# Altium PCB 2018_ACU_LVPWR_rev1.PcbDoc
Units mil, origin at the board's own origin, x right, y up, seen from the top; angles counter-clockwise.
Board outline 7030 x 2760 mil, 2 copper layers (Top Layer, Bottom Layer); 87 components, 72 nets, 303 pads, 163 vias.
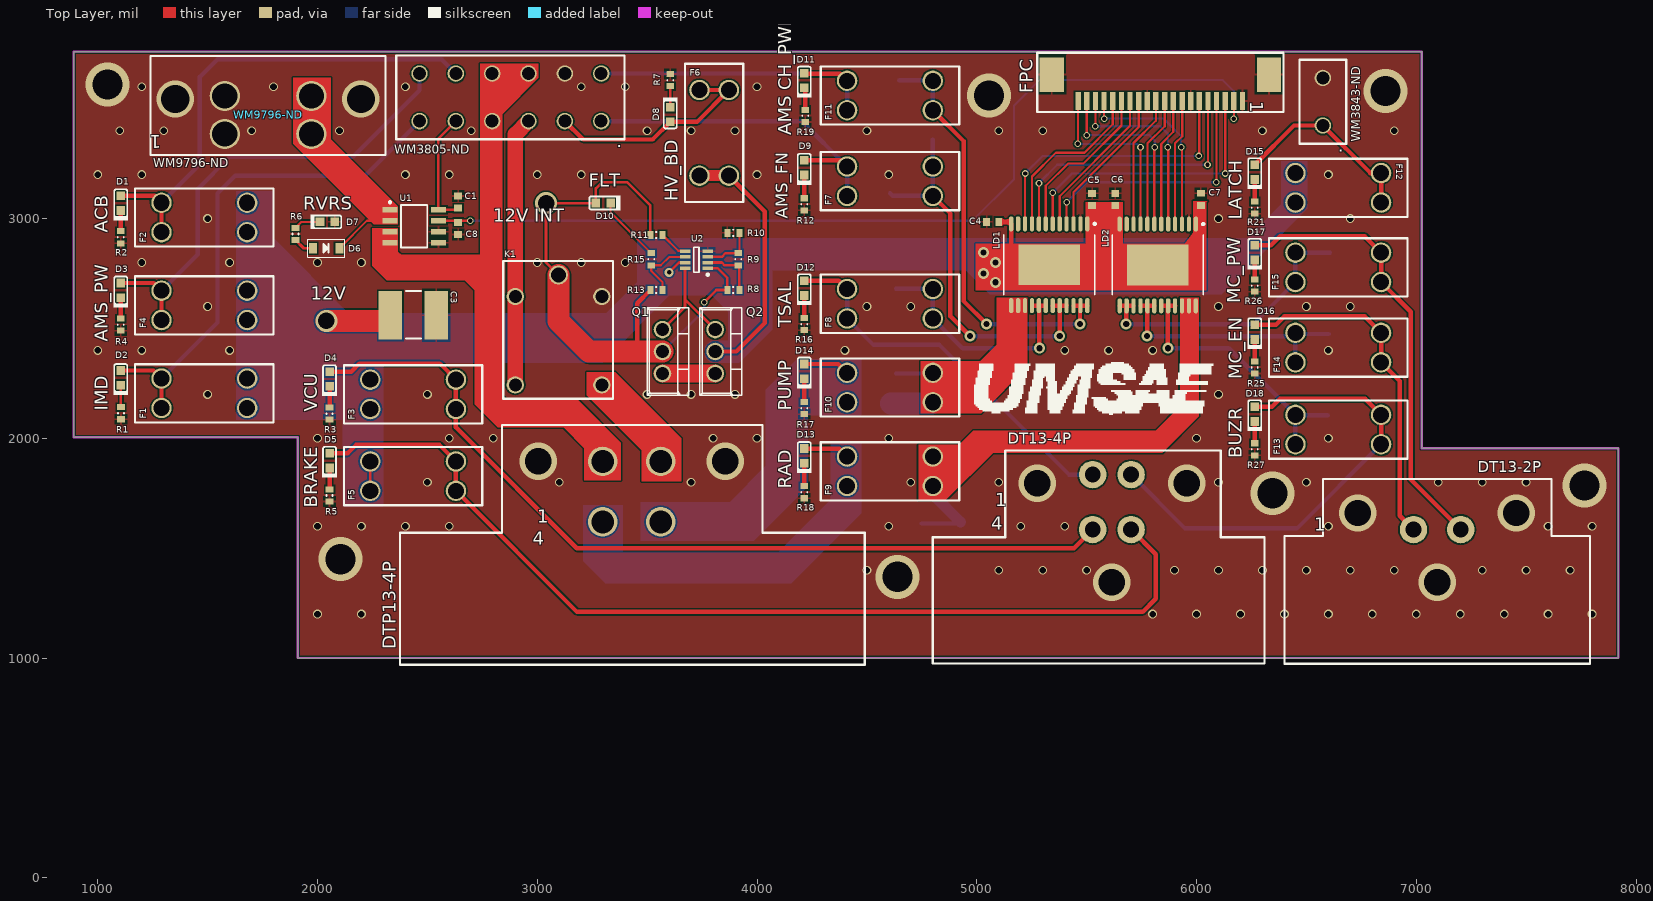
[diagram p0: Top Layer view]
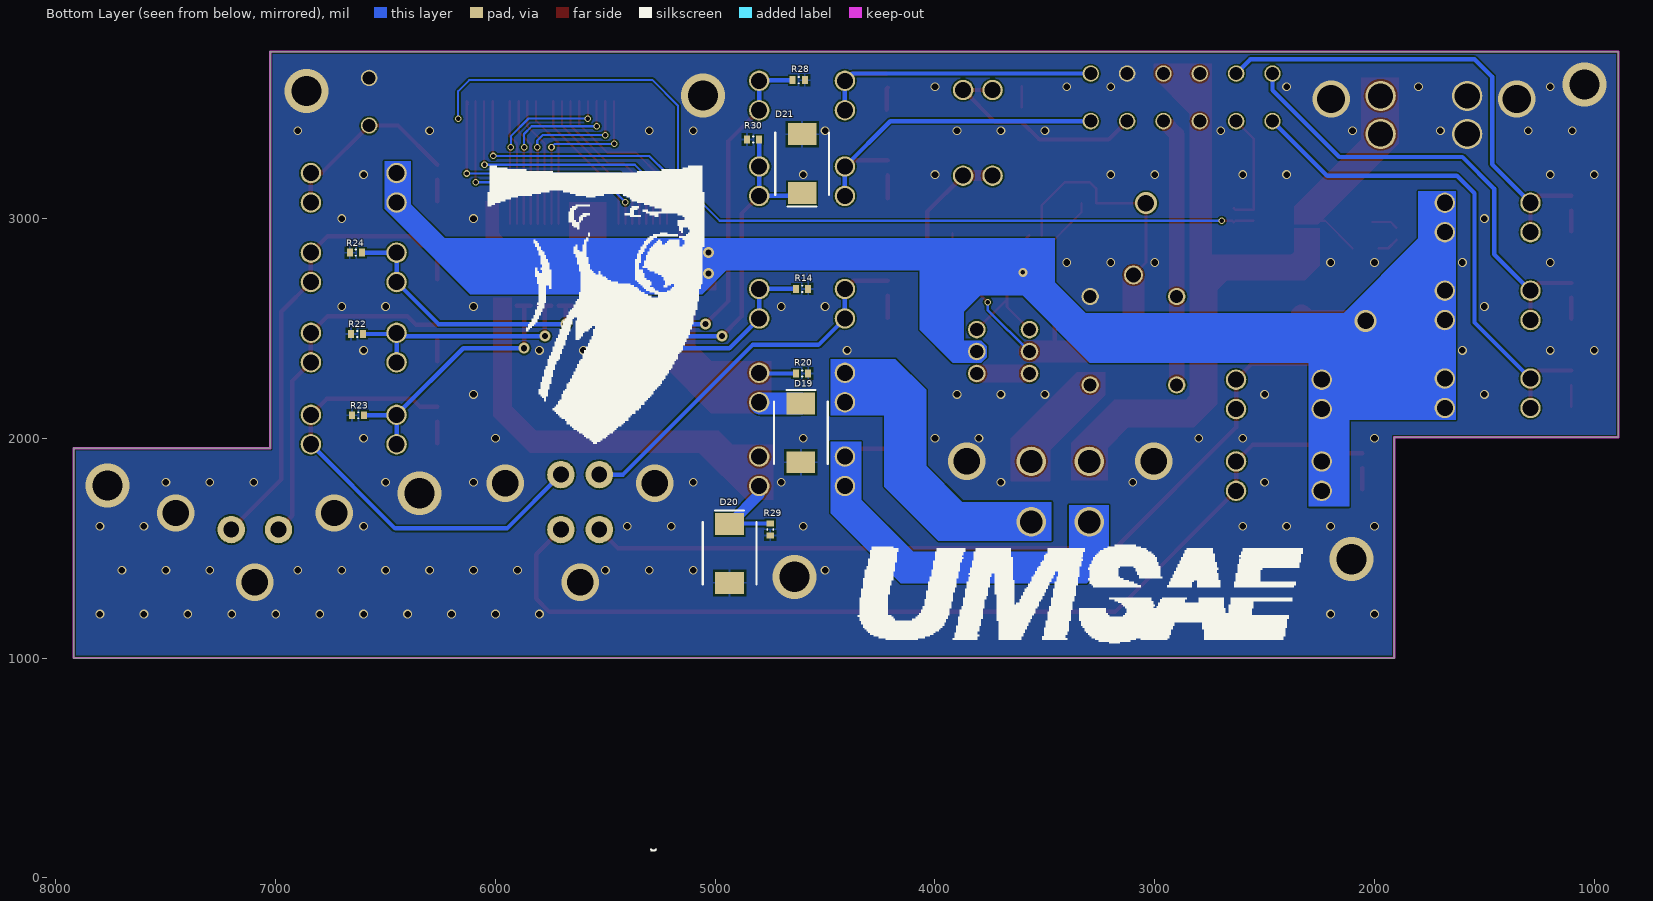
[diagram p1: Bottom Layer view, seen from below]

## Layer stack, top to bottom
Top Solder: solder mask 0.4, Solder Resist, Dk 3.5
Top Layer: signal copper 1.4
Dielectric 1: dielectric 12.6, FR-4, Dk 4.8
Bottom Layer: signal copper 1.4
Bottom Solder: solder mask 0.4, Solder Resist, Dk 3.5

## Board outline
890,3760 7025,3760 7025,1955 7920,1955 7920,1000 1910,1000 1910,2005 890,2005

## Design rules (kind name [scope] priority, off if disabled: settings)
Clearance [All] p1: gap=7 ignorepadtopadclearanceinfootprint=FALSE except(0: Arc-Hole Track-Hole SMDPad-Hole THPad-Hole Via-Hole Fill-Hole Poly-Hole Region-Hole Text-Hole)
Height [All] p1: minheight=0 maxheight=99999 prefheight=500
HoleSize [All] p1: absolutevalues=TRUE maxlimit=200 minlimit=15 maxpercent=80.000 minpercent=20.000
HoleToHoleClearance [All] p1: gap=8 allowstackedmicrovias=TRUE
MinimumAnnularRing MinimumAnnularRing_Pad [IsPad] p1: minimumring=7
MinimumAnnularRing MinimumAnnularRing_Via [IsVia] p2: minimumring=5
MinimumSolderMaskSliver [All] p1: minsoldermaskwidth=4
PlaneClearance [All] p1: clearance=15
PlaneConnect PlaneConnect_12V [InNet('12V')] p1: planeconnectstyle=Direct reliefexpansion=20 reliefentries=4 reliefconductorwidth=20 reliefairgap=10
PlaneConnect PlaneConnect_1 [All] p2: planeconnectstyle=Relief reliefexpansion=15 reliefentries=4 reliefconductorwidth=15 reliefairgap=10
PolygonConnect PolygonConnect_2 [All vs IsPadHoleValid] p1: connectstyle=Direct reliefconductorwidth=10 reliefentries=4 polygonreliefangle="90 Angle" airgapwidth=10
PolygonConnect PolygonConnect_1 [InNet('GND') vs IsPad] p2: connectstyle=Relief reliefconductorwidth=10 reliefentries=4 polygonreliefangle="90 Angle" airgapwidth=10
PolygonConnect [All] p3: connectstyle=Direct reliefconductorwidth=15 reliefentries=4 polygonreliefangle="90 Angle" airgapwidth=10
RoutingVias [All] p1: holewidth=17 width=31 viastyle="Through Hole" minholewidth=15 minwidth=29 maxholewidth=50 maxwidth=100
SilkToSilkClearance [All] p1: silktosilkclearance=7
SilkToSolderMaskClearance [IsPad] p1: minsilkscreentomaskgap=2 clearancetoexposedcopper=TRUE
SolderMaskExpansion [All] p1: expansion=3
Width [All] p1: maxlimit=200 minlimit=7 preferedwidth=15
22 further rules are at their usual default settings.

## Classes and differential pairs
component class Sheet1: DT1 DT2 DT13-2P DT13-4P DTP1 DTP13-4P FPC WM1 WM3805-ND WM3843-ND WM9796-ND
component class Sheet2: C1 C3 C8 D6 D7 D10 K1 Q1 Q2 R6 R8 R9 R10 R11 R13 R15 U1 U2
component class Sheet4: C4 C5 C6 C7 D19 D20 D21 LD1 LD2 R14 R20 R22 R23 R24 R28 R29 R30
component class Sheet5: D1 D2 D3 D4 D5 D8 D9 D11 D12 D13 D14 D15 D16 D17 D18 F1 F2 F3 F4 F5 F6 F7 F8 F9 F10 F11 F12 F13 F14 F15 R1 R2 R3 R4 R5 R7 R12 R16 R17 R18 R19 R21 R25 R26 R27

## Components (designator, comment, footprint, x,y, rotation, side; value= is the part's Value field where it differs from the comment)
C1 "Cap Semi" 1608[0603] 2640,3075 r270 top
C3 "Cap Semi" "2J-LEAD 6.1 X 5.3" 2438.03,2560 r0 top
C4 "Cap Semi" 1608[0603] 5072.44,2985 r0 top
C5 "Cap Semi" 1608[0603] 5525,3087.44 r270 top
C6 "Cap Semi" 1608[0603] 5630,3087.44 r270 top
C7 "Cap Semi" 1608[0603] 6020,3087.56 r270 top
C8 "Cap Semi" 1608[0603] 2640,2955 r90 top
D1 "KP-1608MGC" KING-0603LED_GREEN_V 1105,3070 r90 top
D2 "KP-1608MGC" KING-0603LED_GREEN_V 1105,2275 r90 top
D3 "KP-1608MGC" KING-0603LED_GREEN_V 1105,2673.47 r90 top
D4 "KP-1608MGC" KING-0603LED_GREEN_V 2055,2270 r90 top
D5 "KP-1608MGC" KING-0603LED_GREEN_V 2055,1898.47 r90 top
D6 "" SOD-123 2099.7,2865 r180 top
D7 "RVS PLTY" TOSH-0603LED_RED_V 2045,2985 r0 top
D8 "KP-1608MGC" KING-0603LED_GREEN_V 3605,3473.46 r270 top
D9 "KP-1608MGC" KING-0603LED_GREEN_V 4215,3231.54 r90 top
D10 "RVS PLTY" TOSH-0603LED_RED_V 3300.44,3071.2 r180 top
D11 "KP-1608MGC" KING-0603LED_GREEN_V 4215,3628.47 r90 top
D12 "KP-1608MGC" KING-0603LED_GREEN_V 4215,2683.47 r90 top
D13 "KP-1608MGC" KING-0603LED_GREEN_V 4215,1920 r90 top
D14 "KP-1608MGC" KING-0603LED_GREEN_V 4215,2305 r90 top
D15 "KP-1608MGC" KING-0603LED_GREEN_V 6265,3211.54 r90 top
D16 "KP-1608MGC" KING-0603LED_GREEN_V 6265,2483.47 r90 top
D17 "KP-1608MGC" KING-0603LED_GREEN_V 6265,2845 r90 top
D18 "KP-1608MGC" KING-0603LED_GREEN_V 6265,2110 r90 top
D19 "S8MC-13" S8MC-13 4610,2025 r90 bottom
D20 "S8MC-13" S8MC-13 4935,1476.14 r90 bottom
D21 "S8MC-13" S8MC-13 4605,3250 r270 bottom
DT13-2P "DT13-2P" DT13-2P 7095,1345 r180 top
DT13-4P "DT13-4P" DT13-4P 5615,1345 r180 top
DTP13-4P "DTP13-4P" DTP13-4P 3430,1620 r180 top
F1 "2A Fuse" "FUSE HOLDER - 3568" 1485,2205 r180 top
F2 "1A Fuse" "FUSE HOLDER - 3568" 1485,3005 r180 top
F3 "1A Fuse" "FUSE HOLDER - 3568" 2435,2200 r0 top
F4 "1A Fuse" "FUSE HOLDER - 3568" 1485,2605 r180 top
F5 "2A Fuse" "FUSE HOLDER - 3568" 2435,1828 r0 top
F6 "1A Fuse" "FUSE HOLDER - 3568" 3805,3390 r90 top
F7 "2A Fuse" "FUSE HOLDER - 3568" 4605,3170 r180 top
F8 "2A Fuse" "FUSE HOLDER - 3568" 4605,2612.5 r180 top
F9 "10A Fuse" "FUSE HOLDER - 3568" 4605,1850 r180 top
F10 "15A Fuse" "FUSE HOLDER - 3568" 4605,2231.25 r180 top
F11 "1A Fuse" "FUSE HOLDER - 3568" 4605,3560 r180 top
F12 "1A Fuse" "FUSE HOLDER - 3568" 6645,3140 r0 top
F13 "2A Fuse" "FUSE HOLDER - 3568" 6645,2040 r0 top
F14 "1A Fuse" "FUSE HOLDER - 3568" 6645,2413 r0 top
F15 "3A Fuse" "FUSE HOLDER - 3568" 6645,2778 r0 top
FPC "Header 20" A100319CT-ND 5835.4,3535 r180 top
K1 "Relay" "RELAY -   Z2696-ND" 2900,2444.21 r90 top
LD1 "LD - VNQ5050AKTR-E" "24-SOP (0.295\", 7.50MM WIDTH) EXPOSED PAD" 5330,2790 r270 top
LD2 "LD - VNQ5050AKTR-E" "24-SOP (0.295\", 7.50MM WIDTH) EXPOSED PAD" 5823.74,2788.98 r270 top
Q1 "" TO220V-GDS 3570,2495 r270 top
Q2 "" TO220V-GDS 3810,2495 r270 top
R1 "560" RESC0603(1608)_L 1106,2114.5 r270 top
R2 "560" RESC0603(1608)_L 1105,2915 r270 top
R3 "560" RESC0603(1608)_L 2055,2112.44 r270 top
R4 "560" RESC0603(1608)_L 1105,2517.44 r270 top
R5 "560" RESC0603(1608)_L 2055,1740 r270 top
R6 "430" RESC0603(1608)_L 1900,2930 r270 top
R7 "560" RESC0603(1608)_L 3605,3630 r90 top
R8 "1M" RESC0603(1608)_L 3892.44,2675 r180 top
R9 "12.4K" RESC0603(1608)_L 3915,2815 r270 top
R10 "30.9K" RESC0603(1608)_L 3892.56,2935 r0 top
R11 "10K" RESC0603(1608)_L 3542.44,2925 r0 top
R12 "560" RESC0603(1608)_L 4215,3065 r270 top
R13 "10K" RESC0603(1608)_L 3542.44,2675 r0 top
R14 "10K" RESC0603(1608)_L 4605,2680 r0 bottom
R15 "430" RESC0603(1608)_L 3518.82,2815 r90 top
R16 "560" RESC0603(1608)_L 4215,2520 r270 top
R17 "560" RESC0603(1608)_L 4215,2137.44 r270 top
R18 "560" RESC0603(1608)_L 4215,1755 r270 top
R19 "560" RESC0603(1608)_L 4220,3467.44 r270 top
R20 "10K" RESC0603(1608)_L 4605,2295 r0 bottom
R21 "560" RESC0603(1608)_L 6265,3050 r270 top
R22 "10K" RESC0603(1608)_L 6630,2475 r0 bottom
R23 "10K" RESC0603(1608)_L 6625,2105 r0 bottom
R24 "10K" RESC0603(1608)_L 6635,2845 r180 bottom
R25 "560" RESC0603(1608)_L 6265,2322.44 r270 top
R26 "560" RESC0603(1608)_L 6265,2695 r270 top
R27 "560" RESC0603(1608)_L 6265,1950 r270 top
R28 "10K" RESC0603(1608)_L 4620,3630 r180 bottom
R29 "10K" RESC0603(1608)_L 4750,1585 r270 bottom
R30 "10K" RESC0603(1608)_L 4827.56,3360 r180 bottom
U1 "ACS712ELCTR-20A-T" ALEG-LC-8_V 2440,2965 r270 top
U2 "LTC4365ITS8#TRMPBF" LT-TS8-8-TSOT-23_V 3724.13,2812.8 r180 top
WM3805-ND "Header 12" WM3805-ND 3291.06,3443.46 r180 top
WM3843-ND "Header 2" WM3843-ND 6575,3423.46 r180 top
WM9796-ND "WM9796-ND" WM9796-ND 1775,3385 r180 top

## Footprints (in the part's own frame and the unit in brackets; to place one, negate y for a bottom-side part, rotate by r counter-clockwise, add the part's x,y. Pads: shape width x height; smd on the part's side, far side on the other; paste and mask are expansions set on the pad)
"2J-LEAD 6.1 X 5.3" [mm]
  rect 2.7x5.6 smd: 1(-2.7,0) 2(2.6,0)
  silkscreen extent -0.9,-2.7 0.8,2.8, body extent -3.4,-2.8 3.3,2.8, height 5
"24-SOP (0.295\", 7.50MM WIDTH) EXPOSED PAD" [mm] "VNQ5050KTR-E"
  oval 1.75x0.5 smd: 1(-4.725,4.4) 2(-4.725,3.6) 3(-4.725,2.8) 4(-4.725,2) 5(-4.725,1.2) 6(-4.725,0.4) 7(-4.725,-0.4) 8(-4.725,-1.2) 9(-4.725,-2) 10(-4.725,-2.8) 11(-4.725,-3.6) 12(-4.725,-4.4) 13(4.725,-4.4) 14(4.725,-3.6) 15(4.725,-2.8) 16(4.725,-2) 17(4.725,-1.2) 18(4.725,-0.4) 19(4.725,0.4) 20(4.725,1.2) 21(4.725,2) 22(4.725,2.8) 23(4.725,3.6) 24(4.725,4.4)
  rect 4.7x7.1 smd: 25(0,0)
  silkscreen extent -4.85,-5.25 3.45,5.38, body extent -3.8,-5.25 3.8,5.25, height 2.45
1608[0603] [mm] "Chip Capacitor, Body 1.6x0.8mm, IPC High Density"
  rect 0.8x0.9 smd: 1(-0.7,0) 2(0.7,0)
  body extent -0.87,-0.48 0.87,0.48, height 1.3
A100319CT-ND [mil]
  rect 24x82.68 smd: 1(-374.02,0)
  rect 24x80 smd: 2(-334.65,0) 3(-295.28,0) 4(-255.91,0) 5(-216.54,0) 6(-177.17,0) 7(-137.8,0) 8(-99.6,0) 9(-59.06,0) 10(-19.69,0) 11(20.4,0) 12(59.06,0) 13(98.43,0) 14(137.8,0) 15(177.17,0) 16(216.54,0) 17(255.91,0) 18(295.28,0) 19(334.65,0) 20(374.02,0)
  rect 110.24x157.48 smd: 21(-494.09,-120.08) 21(494.09,-120.08)
  silkscreen extent -560,-220 560,50, body extent -550,-226 550,32, height 100
ALEG-LC-8_V [mm] "SOIC, 8-Leads, Body 4.9x3.9mm, Pitch 1.27mm"
  rect 0.65x1.75 smd: 1(-1.905,-2.8) 2(-0.635,-2.8) 3(0.635,-2.8) 4(1.905,-2.8) 5(1.905,2.8) 6(0.635,2.8) 7(-0.635,2.8) 8(-1.905,2.8)
  silkscreen extent -2.9,-2.92 2.45,1.53, body extent -2.45,-1.95 2.45,1.95, height 1.75
DT13-2P [mil]
  round 125 hole 72: 1(107.5,-240) 2(-107.5,-240)
  silkscreen extent -695,-470 695,371, body extent -695,-475 695,945, height 1090
DT13-4P [mil]
  round 125 hole 72: 1(87.5,-490) 2(-87.5,-490) 3(-87.5,-240) 4(87.5,-240)
  silkscreen extent -695,-600 815,370, body extent -700,-607 810,947, height 1394
DTP13-4P [mil]
  round 134 hole 104: 1(132,-275) 2(-132,-275) 3(-132,0) 4(132,0)
  silkscreen extent -1060,-440 1055,650, body extent -1070,-440 1060,1397, height 1419
"FUSE HOLDER - 3568" [mil]
  round 93 hole 73: 1(-195,-67) 1(-195,67) 2(195,-67) 2(195,67)
  silkscreen extent -315,-133 315,133, body extent -317,-130 313,135, height 290
KING-0603LED_GREEN_V [mm] "SMT LED, 2-Leads, Body 1.6x0.8mm (0603-Size)"
  rect 1x1 smd paste+0 mask+0: 1(0.85,0) 2(-0.85,0)
  silkscreen extent -1.97,-0.85 1.6,0.85, body extent -0.92,-0.53 1.09,0.53, height 1.1
LT-TS8-8-TSOT-23_V [mm] "SOT23, 8-Leads, Body 2.9x1.75mm, Pitch 0.65mm"
  rect 1.22x0.4 smd mask+0: 1(-1.31,0.975) 2(-1.31,0.325) 3(-1.31,-0.325) 4(-1.31,-0.975) 5(1.31,-0.975) 6(1.31,-0.325) 7(1.31,0.325) 8(1.31,0.975)
  silkscreen extent -1.43,-1.45 0.3,1.85, body extent -0.87,-1.45 0.88,1.45, height 1
"RELAY -   Z2696-ND" [mm]
  round 2.2 hole 1.7: 1(7.6,-5)
  round 2 hole 1.5: 2(5.1,0) 3(-5.1,0) 4(-5.1,-10) 5(5.1,-10)
  silkscreen extent -6.7,-11.3 9.2,1.4
RESC0603(1608)_L [mm]
  rect 0.7x0.9 smd: 1(-0.7,0) 2(0.7,0)
  silkscreen extent -0.05,-0.35 0.05,0.35, body extent -0.85,-0.47 0.85,0.47, height 0.6
S8MC-13 [mil]
  rect 100x130 smd: 1(-133.86,0) 2(133.86,0)
  silkscreen extent -142,-122 195,122
SOD-123 [mm]
  rect 0.9x1.2 smd: A(3.048,0) K(0,0)
  silkscreen extent -0.64,-1.02 3.68,1.02, body extent -0.18,-0.87 3.3,0.87, height 0.79
TO220V-GDS [mil]
  round 80 hole 60: D(100,0) G(0,0) S(200,0)
  silkscreen extent -100,-70 300,120, body extent -100,-70 300,120, height 920
TOSH-0603LED_RED_V [mm] "SMT LED, 2-Leads, Body 1.6x0.8mm (0603-Size)"
  rect 1x1 smd paste+0 mask+0: 1(0.85,0) 2(-0.85,0)
  silkscreen extent -1.97,-0.85 1.6,0.85, body extent -0.92,-0.53 1.09,0.53, height 0.6
WM3805-ND [mm]
  round 1.9 hole 1.5: 1(0,0) 2(4.2,0) 3(8.4,0) 4(12.6,0) 5(16.8,0) 6(21,0) 7(0,-5.5) 8(4.2,-5.5) 9(8.4,-5.5) 10(12.6,-5.5) 11(16.8,-5.5) 12(21,-5.5)
  silkscreen extent -2.7,-7.6 23.7,2.1, body extent -3.06,-8.74 24.14,2.26, height 12.8
WM3843-ND [mm]
  round 1.9 hole 1.5: 1(0,0) 2(0,-5.5)
  silkscreen extent -2.7,-7.6 2.7,2.1, body extent -3.1,-8.74 3.1,2.26, height 12.8
WM9796-ND [mm]
  round 3.5 hole 2.9: 1(5,0) 1(5,-4.4) 2(-5,0) 2(-5,-4.4)
  silkscreen extent -13.59,-9.02 13.59,2.41, body extent -11.78,-9.51 12.04,4.59, height 21.3

## Part data
C1 C3 C4 C5 C6 C7 C8: "Capacitor (Semiconductor SIM Model)"
D1 D2 D3 D4 D5 D8 D9 D11 D12 D13 D14 D15 D16 D17 D18: library part CMP-0404-00001-1, "LED, SMT, 0603(1608), 1.1mm thickness, Green"
D6: library part "Diode 1N4003", "1 Amp General Purpose Rectifier"
D7 D10: library part CMP-0444-00001-1, "LED, Red 0603 (1608) 63mCd"
D19 D20 D21: library part Diode, "Default Diode"
DT13-2P WM9796-ND: library part "Header 2", "Header, 2-Pin"
DT13-4P DTP13-4P: library part "Header 4", "Header, 4-Pin"
F1 F2 F3 F4 F5 F6 F7 F8 F9 F10 F11 F12 F13 F14 F15: library part "Fuse 1", "Fuse"
FPC: "Header, 20-Pin"
K1: "SPDT Relay"
LD1 LD2: library part "LOAD DRIVER - VNQ5050"
Q1 Q2: library part CMP-1058-00860-1, "Power MOSFET, 40 V, 167 A, Single N-Channel, 3-Pin TO-220, Pb-Free, Tube"
R1 R2 R3 R4 R5 R6 R7 R8 R9 R10 R11 R12 R13 R14 R15 R16 R17 R18 R19 R20 R21 R22 R23 R24 R25 R26 R27 R28 R29 R30: library part CMP-1591-00001-1, "0603 (1608 Metric) Chip Resistor"
U1: library part CMP-0826-00001-1, "Linear Current Sensor IC, 4.5 to 5.5 V Supply Voltage, 10 mA Supply Current, -40 to 85 degC, 8-Pin SOIC (LC), RoHS, Tape and Reel"
U2: library part CMP-0474-00861-1, "UV, OV and Reverse Supply Protection Controller, 2.5 to 34 V Vin, 8-pin SOT23 (TS8-8), -40 to 85 degC, Pb-Free, Mini Tape and Reel"
WM3805-ND: "Header, 12-Pin"
WM3843-ND: "Header, 2-Pin"

## Via types
v1: diameter 40, hole 30, Top Layer to Bottom Layer, 112 vias
v2: diameter 30, hole 20, Top Layer to Bottom Layer, 19 vias
v3: diameter 50, hole 28, Top Layer to Bottom Layer, 12 vias
v4: diameter 170, hole 120, Top Layer to Bottom Layer, 8 vias
v5: diameter 200, hole 137, Top Layer to Bottom Layer, 7 vias
v6: diameter 100, hole 75, Top Layer to Bottom Layer, 2 vias
v7: diameter 170, hole 128, Top Layer to Bottom Layer, 2 vias
v8: diameter 40, hole 20, Top Layer to Bottom Layer, 1 vias

## Nets (pads, with @x,y where several pads share a name; then routed paths per layer and width w, separated by ;. In a path a pad name is that pad's centre, name@x,y a point inside that pad or via, vN(x,y) a via of type N, cw(c..) or ccw(c..) an arc to the next point about the centre after c; other vN are vias at no path point)
5V: C1.2 U1.8 WM3805-ND.5 | length 529.7
  Top Layer w12: WM3805-ND.5 2550.24,3364.06 U1.8 2632.56,3040 C1.2
  Bottom Layer w20: WM3805-ND.5 WM3805-ND.5@2630,3443.11
12V: C3.1 C4.2 C5.2 C6.2 C7.2 F1.1 F2.1 F3.1 F4.1 F5.1 F6.1 F12.1 LD1.1 LD1.12 LD1.25 LD2.1 LD2.12 LD2.25 Q2.D U2.7 | length 1842.4
  Top Layer w12: F5.1@2240,1761 F5.1@2240,1895 ; v8(3600,2755) 3645,2800 U2.7
  Top Layer w20: Q2.D 3905,2395 4035,2525 4035,3032 F6.1@3872,3195 ; C4.2 5147.8,2985 LD1.12 5156.77,2871.77
  Top Layer w50: F6.1@3738,3195 F6.1@3872,3195
  Top Layer w100: v6(2040,2535) 2306.73,2535 C3.1
  other v3: 5085,2710 5030,2750 5085,2800 5030,2845
12V_FROM_MS: DTP13-4P.2 K1.4
12V_IN: D6.K U1.1 U1.2 WM9796-ND.2 | length 281.8
  Top Layer w10: D6.K 2224.7,2990 U1.2
12V_INTERMEDIATE: D10.1 K1.1 Q1.D R8.2 R11.1 R13.1 U2.1 | length 2720.9
  Top Layer w12: K1.1@3080,2760.28 3040,2800.28 v6(3040,3070) 3265.78,3070 D10.1 3266.97,3136.97 3295,3165 3410,3165 3514.88,3060.12 R11.1 ; v2(3760,2620) 3815,2675 R8.2 3864.88,2730.12 3820.59,2774.41 U2.1
  Top Layer w20: 3455,2395 3455,2615.12 R13.1
  Top Layer w50: K1.1@3080,2760.28 K1.1
  Top Layer w100: K1.1 3096.85,2533.15 3235,2395 3455,2395 Q1.D
  Bottom Layer w12: Q1.D 3760,2585 v2(3760,2620)
12V_TO_MS: DTP13-4P.1 U1.3 U1.4 WM3805-ND.4 WM3805-ND.9 WM3805-ND.10
ACB_POWER: D1.1 F2.2 WM3805-ND.11 | length 2202.2
  Top Layer w20: D1.1 1258.54,3103.46 1290,3072 F2.2@1290,2938
  Bottom Layer w20: F2.2@1290,3072 1465,3247 1465,3645 1545,3725 2564.65,3725 WM3805-ND.11
ACCUMULATOR_FAN: D21.2 F7.1 LD1.19 LD1.20 LD1.21 R30.2 | length 1775.4
  Top Layer w20: F7.1@4800,3103 4880,3023 4880,2555 v3(4970,2465) ; LD1.19 LD1.20 ; v3(5377.5,2465) 5377.5,2603.72 LD1.20 ; LD1.21 LD1.20
  Bottom Layer w20: D21.2 4618.14,3103 4800,3103 4800,3237 R30.2 ; v3(4970,2465) v3(5377.5,2465)
ACCUMULATOR_FAN_CONTROL: FPC.14 LD1.5 | length 691.7
  Top Layer w10: LD1.5 5377.24,3102.24 5697.6,3422.6 FPC.14
ACCUMULATOR_FAN_FEEDBACK: FPC.3 LD1.6 | length 1314.4
  Top Layer w10: LD1.6 5345.75,3117.41 v2(5346.67,3118.33) ; FPC.3@6125,3519.32 6130,3524.32 6125,3529.32 FPC.3 6130.68,3205.68 v2(6130,3205)
  Bottom Layer w10: v2(5346.67,3118.33) 5433.33,3205 v2(6130,3205)
AMS_CHARGE_POWER: F11.1 LD1.22 LD1.23 LD1.24 R28.1 | length 1934.9
  Top Layer w20: F11.1@4800,3493 4940,3353 4940,2625 v3(5045,2520) ; LD1.22 LD1.23 ; v3(5470,2520) 5470,2602.24 LD1.23 ; LD1.24 LD1.23
  Bottom Layer w20: R28.1 4797,3630 4800,3627 F11.1@4800,3493 ; v3(5045,2520) v3(5470,2520)
AMS_CHARGE_POWER_CONTROL: FPC.13 LD1.3 | length 681.9
  Top Layer w10: LD1.3 5440.24,3120.24 5736.97,3416.97 FPC.13
AMS_CHARGE_POWER_FEEDBACK: FPC.4 LD1.4 | length 1187.3
  Top Layer w10: LD1.4 5408.74,3073.74 v2(5410,3075) ; v2(6090,3165) 6091.31,3166.31 FPC.4
  Bottom Layer w10: v2(5410,3075) 5500,3165 v2(6090,3165)
AMS_CHARGE_POWER_OUT: D11.1 F11.2 WM3805-ND.7 | length 1470.2
  Top Layer w20: D11.1@4220,3659 4220,3658.46 4378.54,3658.46 F11.2@4410,3627
  Bottom Layer w20: WM3805-ND.7 4377,3660 4410,3627 F11.2@4410,3493
AMS_FANS: D9.1 F7.2 WM3805-ND.1 | length 1545.1
  Top Layer w20: D9.1 4382,3265 F7.2@4410,3237
  Bottom Layer w20: WM3805-ND.1 4203.54,3443.46 4410,3237 F7.2@4410,3103
AMS_POWER: D3.1 F4.2 WM3805-ND.12 | length 2135.9
  Top Layer w20: D3.1 1255.07,2706.93 1290,2672 F4.2@1290,2538
  Bottom Layer w20: F4.2@1290,2672 1455,2837 1455,3135 1600,3280 2160,3280 2464.29,3584.29 WM3805-ND.12
BRAKE_OUT: D5.1 DT13-4P.3 F5.2 | length 4555.5
  Top Layer w20: D5.1 2136.93,1931.93 2175,1970 2555,1970 2630,1895 2630,1761 3181,1210 5755,1210 5815,1270 5815,1472.5 DT13-4P.3
BUZZER: F13.1 LD2.19 LD2.20 LD2.21 R23.1 | length 1243.6
  Top Layer w20: LD2.19 5869.02,2602.95 LD2.20@5870,2601.97 ; v3(5870,2410) LD2.20@5870,2601.97 ; LD2.21 LD2.20 LD2.20@5870,2601.97
  Bottom Layer w20: v3(5870,2410) 6147,2410 F13.1@6450,2107 ; F13.1@6450,1973 F13.1@6450,2107 ; R23.1 6452,2105 F13.1@6450,2107
BUZZER_CONTROL: FPC.18 LD2.5 | length 870
  Top Layer w10: v2(5540,3420) 5540,3534.88 FPC.18 ; v2(5870,3325) 5870.98,3324.02 LD2.5
  Bottom Layer w10: v2(5540,3420) 5835,3420 5870,3385 v2(5870,3325)
BUZZER_FEEDBACK: FPC.9 LD2.6 | length 582.8
  Top Layer w10: LD2.6 5839.49,3339.49 5894.46,3394.46 FPC.9
BUZZER_OUT: D18.1 DT13-4P.2 F13.2 | length 2152
  Top Layer w20: D18.1 6343.46,2143.46 6380,2180 6767,2180 6840,2107 F13.2@6840,1973
  Bottom Layer w20: DT13-4P.2 5947.5,1590 6457,1590 F13.2@6840,1973
CURR_SENS: C8.2 FPC.2 U1.7 | length 4313
  Top Layer w10: U1.7 2632.56,2990 C8.2 2647.44,2990 v2(2695,2990) ; v2(6170,3455) FPC.2 FPC.2
  Bottom Layer w10: v2(2695,2990) 4980,2990 5170,3180 5170,3515 5285,3630 6120,3630 6170,3580 v2(6170,3455)
FAULT: R13.2 R15.1 U2.6 | length 303.2
  Top Layer w10: R13.2 3570,2710 3518.82,2761.18 R15.1 3562.44,2787.44 3600.59,2825.59 U2.6
GATE: Q1.G Q2.G U2.8 | length 517.1
  Top Layer w12: Q1.G 3672.56,2597.56 3672.56,2632.44 ; U2.8@3671.97,2775 U2.8 3672.56,2632.44 ; Q2.G 3672.56,2632.44
GND: C1.1 C3.2 C4.1 C5.1 C6.1 C7.1 C8.1 D7.1 D19.1 D20.1 D21.1 FPC.1 FPC.7 FPC.12 FPC.21 K1.5 LD1.2 LD2.2 R1.2 R2.2 R3.2 R4.2 R5.2 R7.2 R10.1 R12.2 R14.1 R16.2 R17.2 R18.2 R19.2 R20.1 R21.2 R22.2 R23.2 R24.1 R25.2 R26.2 R27.2 R28.2 R29.2 R30.1 U1.5 U1.6 U2.4 WM3805-ND.8 WM3843-ND.2 WM9796-ND.1
  other v1: 2000,1200 2200,1200 5800,1200 6000,1200 6200,1200 6400,1200 6600,1200 6800,1200 7000,1200 7200,1200 7400,1200 7600,1200 7800,1200 4500,1400 5100,1400 5300,1400 5500,1400 5900,1400 6100,1400 6300,1400 6500,1400 6700,1400 6900,1400 7300,1400 7500,1400 7700,1400 2000,1600 2200,1600 2400,1600 2600,1600 4600,1600 5200,1600 5400,1600 6600,1600 7600,1600 7800,1600 2500,1800 3100,1800 3700,1800 4700,1800 5100,1800 6100,1800 6500,1800 7100,1800 7300,1800 7500,1800 2000,2000 2600,2000 2800,2000 3800,2000 4000,2000 4600,2000 6000,2000 6600,2000 1500,2200 2500,2200 3500,2200 3700,2200 3900,2200 6100,2200 1000,2400 1200,2400 1600,2400 4400,2400 5400,2400 5600,2400 5800,2400 6600,2400 1500,2600 4500,2600 4700,2600 6100,2600 6500,2600 6700,2600 1200,2800 1600,2800 2000,2800 2200,2800 3000,2800 3200,2800 3400,2800 1500,3000 6100,3000 6700,3000 1000,3200 1200,3200 2400,3200 2600,3200 3000,3200 3200,3200 4000,3200 4600,3200 6600,3200 1100,3400 1300,3400 1700,3400 2100,3400 2700,3400 3500,3400 3700,3400 3900,3400 4500,3400 5100,3400 5300,3400 6300,3400 6900,3400 1200,3600 1800,3600 2400,3600 3200,3600 3400,3600 4000,3600
  other v4: 5615,1345 7095,1345 6734.5,1660 7455.5,1660 5274.5,1795 5955.5,1795 3005,1895 3855,1895
  other v5: 4640,1370 2105,1450 6345,1750 7765,1785 5055,3560 6860,3580 1045,3610
  other v7: 1352.56,3544.45 2197.44,3544.45
HV_BOARD_POWER: D8.1 F6.2 WM3805-ND.2 | length 1008.1
  Top Layer w20: WM3805-ND.2 3209.17,3360 3525,3360 D8.1 3727,3440 3872,3585 F6.2@3738,3585
IMD_POWER: D2.1 F1.2 WM3805-ND.6 | length 2338.1
  Top Layer w20: D2.1 1253.54,2308.46 1290,2272 F1.2@1290,2138
  Bottom Layer w20: F1.2@1290,2272 1545,2527 1545,3115 1625,3195 2215.83,3195 WM3805-ND.6
LATCHING_POWER: D15.1 F12.2 WM3843-ND.1 | length 872.6
  Top Layer w20: D15.1 6443.46,3423.46 WM3843-ND.1 6791.46,3207 6840,3207 F12.2@6840,3073
LV_CHARGE_POWER: K1.2 K1.3 WM3805-ND.3 | length 1225
  Top Layer w70: K1.3 K1.2 2900,3383.11 WM3805-ND.3
MC_ENABLE: F14.1 LD2.16 LD2.17 LD2.18 R22.1 | length 1171.3
  Top Layer w20: LD2.16 LD2.17 ; v3(5775,2465) 5775,2601.46 LD2.17 ; LD2.18 LD2.17
  Bottom Layer w20: v3(5775,2465) 6435,2465 F14.1@6450,2480 ; F14.1@6450,2346 F14.1@6450,2480 ; R22.1 6455,2475 F14.1@6450,2480
MC_ENABLE_CONTROL: FPC.19 LD2.7 | length 856.5
  Top Layer w10: v2(5500,3380) 5500.75,3380.75 FPC.19 ; LD2.7 5807.99,3322.99 v2(5810,3325)
  Bottom Layer w10: v2(5500,3380) 5785,3380 5810,3355 v2(5810,3325)
MC_ENABLE_FEEDBACK: FPC.10 LD2.8 | length 592.7
  Top Layer w10: LD2.8 5776.34,2975.15 5776.34,3341.34 5855.09,3420.09 FPC.10
MC_ENBL_OUT: D16.1 DT13-2P.1 F14.2 | length 1577.9
  Top Layer w20: D16.1 6361.93,2516.93 6400,2555 6765,2555 6840,2480 6840,2346 6925,2261 6925,1647.5 DT13-2P.1
MC_POWER: F15.1 LD2.13 LD2.14 LD2.15 R24.2 | length 1287.3
  Top Layer w20: LD2.13 LD2.14 ; v3(5680,2520) 5680,2600.94 LD2.14 ; LD2.15 LD2.14
  Bottom Layer w20: v3(5680,2520) 6259,2520 6450,2711 6450,2845 R24.2
MC_POWER_CONTROL: FPC.20 LD2.9 | length 826.8
  Top Layer w10: v2(5460,3340) 5461.38,3341.38 FPC.20 ; LD2.9 v2@5745,3315
  Bottom Layer w10: v2(5460,3340) 5730,3340 v2(5745,3325)
MC_POWER_FEEDBACK: FPC.11 LD2.10 | length 602
  Top Layer w10: LD2.10 5713.5,3343.5 5815,3445 FPC.11
MC_PWR_OUT: D17.1 DT13-2P.2 F15.2 | length 2033.4
  Top Layer w20: D17.1 6338.46,2878.46 6380,2920 6765,2920 6840,2845 6840,2711 6975,2576 6975,1812.5 DT13-2P.2
NetD1_2: D1.2 R2.1 | length 94
  Top Layer w20: R2.1 D1.2
NetD2_2: D2.2 R1.1 | length 99.9
  Top Layer w10: D2.2 1105,2143.06 R1.1
NetD3_2: D3.2 R4.1 | length 95
  Top Layer w20: R4.1 D3.2
NetD4_2: D4.2 R3.1 | length 96.5
  Top Layer w20: R3.1 D4.2
NetD5_2: D5.2 R5.1 | length 97.4
  Top Layer w20: R5.1 D5.2
NetD6_A: D6.A R6.2 | length 95.2
  Top Layer w12: R6.2 1937.44,2865 D6.A
NetD7_2: D7.2 R6.1 | length 122.9
  Top Layer w10: R6.1 1927.44,2985 D7.2
NetD8_2: D8.2 R7.1 | length 95.5
  Top Layer w10: D8.2 R7.1
NetD9_2: D9.2 R12.1 | length 105.5
  Top Layer w20: R12.1 D9.2
NetD10_2: D10.2 R15.2 | length 305.2
  Top Layer w10: D10.2 3333.9,3027.47 R15.2
NetD11_2: D11.2 R19.1 | length 102.1
  Top Layer w20: D11.2 4220,3590 R19.1
NetD12_2: D12.2 R16.1 | length 102.4
  Top Layer w20: R16.1 D12.2
NetD13_2: D13.2 R18.1 | length 104
  Top Layer w20: R18.1 D13.2
NetD14_2: D14.2 R17.1 | length 106.5
  Top Layer w20: R17.1 D14.2
NetD15_2: D15.2 R21.1 | length 100.5
  Top Layer w20: R21.1 D15.2
NetD16_2: D16.2 R25.1 | length 100
  Top Layer w20: R25.1 D16.2
NetD17_2: D17.2 R26.1 | length 89
  Top Layer w20: R26.1 D17.2
NetD18_2: D18.2 R27.1 | length 99
  Top Layer w20: R27.1 D18.2
OV: R9.1 R10.2 U2.3 | length 240.9
  Top Layer w10: R9.1 3920.12,2847.68 R10.2
  Top Layer w12: U2.3 3840.59,2825.59 3857.56,2842.56 R9.1
PUMP: D19.2 F10.1 LD1.13 LD1.14 LD1.15 R20.2 | length 424
  Top Layer w20: LD1.13 LD1.14 LD1.15
  Bottom Layer w20: R20.2 4796.75,2295 F10.1@4800,2298.25
  Bottom Layer w50: F10.1@4794.61,2158.86 F10.1@4800,2164.25
  Bottom Layer w100: D19.2 F10.1@4794.61,2158.86
PUMP_CONTROL: FPC.16 LD1.9 | length 787.4
  Top Layer w10: LD1.9 5251.26,3191.26 5360,3300 5490,3300 5618.86,3428.86 FPC.16
PUMP_FEEDBACK: FPC.6 LD1.10 | length 1303.3
  Top Layer w10: LD1.10 5219.76,3204.76 v2(5220,3205) ; v2(6010,3285) 6012.57,3287.57 FPC.6
  Bottom Layer w10: v2(5220,3205) 5300,3285 v2(6010,3285)
PUMP_OUT: D14.1 DTP13-4P.3 F10.2 | length 211.7
  Top Layer w20: D14.1 4369.79,2338.46 F10.2@4410,2298.25
RAD: D20.2 F9.1 LD2.22 LD2.23 LD2.24 R29.1 | length 455.9
  Top Layer w20: LD2.22 LD2.23 LD2.24
  Bottom Layer w20: R29.1 4917.56,1612.56 D20.2@4925,1620
  Bottom Layer w50: F9.1@4800,1783 4800,1745 D20.2@4925,1620
RAD_CONTROL: FPC.17 LD2.3 | length 865
  Top Layer w10: FPC.17 5579.49,3455.51 v2(5580,3455) ; v2(5930,3325) 5933.98,3321.02 LD2.3
  Bottom Layer w10: v2(5580,3455) 5850,3455 5930,3375 v2(5930,3325)
RAD_FEEDBACK: FPC.8 LD2.4 | length 573.5
  Top Layer w10: LD2.4 5902.48,3342.48 5935,3375 FPC.8
RAD_OUT: D13.1 DTP13-4P.4 F9.2 | length 210.1
  Top Layer w20: D13.1 4373.54,1953.46 F9.2@4410,1917
SHDN: R11.2 U2.5 | length 133.1
  Top Layer w10: R11.2 3641.26,2853.74 3670,2853.74 U2.5
SOURCE: Q1.S Q2.S | length 240
  Top Layer w80: Q1.S Q2.S
TSAL: F8.1 LD1.16 LD1.17 LD1.18 R14.2 | length 1100.7
  Top Layer w20: LD1.16 LD1.17 ; v3(5285,2410) 5285,2601.73 LD1.17 ; LD1.18 LD1.17
  Bottom Layer w20: R14.2 4799.5,2680 4800,2679.5 4800,2545.5 4935.5,2410 v3(5285,2410)
TSAL_CONTROL: FPC.15 LD1.7 | length 742.5
  Top Layer w10: LD1.7 5314.25,3149.25 5415,3250 5485,3250 5658.23,3423.23 FPC.15
TSAL_FEEDBACK: FPC.5 LD1.8 | length 1277.9
  Top Layer w10: LD1.8 5282.76,3161.09 v2(5283.33,3161.67) ; v2(6050,3245) 6051.94,3246.94 FPC.5
  Bottom Layer w10: v2(5283.33,3161.67) 5366.67,3245 v2(6050,3245)
TSAL_OUT: D12.1 DT13-4P.1 F8.2 | length 1756.3
  Top Layer w20: D12.1 4372.57,2716.93 F8.2@4410,2679.5
  Bottom Layer w20: F8.2@4410,2679.5 4410,2545.5 4530.5,2425 4830,2425 5420,1835 DT13-4P.1
UV: R8.1 R9.2 U2.2 | length 259
  Top Layer w12: U2.2 3840,2800 3852.56,2787.44 R9.2 3920,2782.44 R8.1
VCU_POWER_OUT: D4.1 DT13-4P.4 F3.2 | length 3997.9
  Top Layer w20: D4.1 2153.46,2303.46 2190,2340 2557,2340 2630,2267 2630,2133 2630,2050 3180,1500 5442.5,1500 DT13-4P.4
pads on no net: LD1.11 LD2.11

## Polygon pours and split planes (outlines as drawn)
GND on Bottom Layer "GND" (solid, pour order 11): 890,3760 890,2005 1910,2005 1910,1000 7910,1000 7920,1010 7920,1955 7035,1955 7025,1965 7025,3760
GND on Top Layer "GND" (solid, pour order 13): 7025,3760 7025,1955 7030,1950 7920,1950 7920,1000 1910,1000 1910,2005 890,2005 890,3750

## Keep-outs
Keep-Out Layer:
  the board outline again, w10

## Other copper
Top Layer:
  rectangle net 12V: 5495,2885 5665,3075
  region net PUMP: 5090,2640 5230,2640 5230,2325 5020,2115 4745,2115 4745,2350 5015,2350 5090,2425
  region net RAD: 5925,2640 6010,2640 6010,2100 5845,1935 5075,1935 4860,1720 4735,1720 4735,1970 4920,1970 4985,2035 5815,2035 5925,2145
  region net 12V: 4995,2675 6045,2675 6045,3075 6050,3080 5985,3080 5985,2935 5946.11,2885 4995,2885
  region net 12V_IN: 1890,3640 2060,3640 2060,3360 2365,3055 2365,2975 2255,2975 1890,3340
  region net 12V_TO_MS: 2365,2955 2365,2850 2380,2835 2765,2835 2840,2760 2840,2195 2860,2175 3185,2175 3380,1980 3380,1810 3215,1810 3215,1955 3120,2050 2820,2050 2715,2155 2715,2675 2670,2720 2314.99,2720 2250,2784.99 2250,2955
  region net 12V_TO_MS: 2740,3705 3005,3705 3005,3640 2840,3475 2840,3185 2840,2760 2775,2825 2740,2825 2740,3205 2740,3595
  region net 12V_FROM_MS: 3225,2300 3225,2195 3475,1945 3475,1805 3655,1805 3655,2000 3355,2300
Bottom Layer:
  region net PUMP_OUT: 4475,2360 4475,2105 4230,2105 4230,1780 3985,1535 3470,1535 3470,1710 3875,1710 4040,1875 4040,2220 4180,2360
  region net RAD_OUT: 4335,1985 4475,1985 4475,1660 4155,1340 3309.99,1340 3210,1439.99 3210,1695 3390,1695 3390,1485 4100,1485 4335,1720
  region net 12V: 1630,3125 1630,2085 2115,2085 2115,1690 2300,1690 2300,2345 3295,2345 3600,2650 3795,2650 3870,2575 3870,2445 3790,2445 3765,2420 3765,2370 3790,2345 3920,2345 4070,2495 4070,2910 3455,2910 3455,2710 3315,2570 2140,2570 1800,2910 1800,3125
  region net 12V: 4070,2910 6230,2910 6385,3065 6385,3260 6505,3260 6505,3045 6115,2655 5060,2655 4950,2765 4070,2765

## Silkscreen, mask and mechanical layers (free items; w line width, h text height)
Top Overlay:
  drawing of 6 lines, arcs and shapes, not listed
  text "AMS CH_PWR" at 4155,3380 h60 r90
  text "FLT" at 3235,3145 h60
  text "HV_BD" at 3640,3080 h60 r90
  text "RVRS" at 1935,3040 h60
  text "AMS_FN" at 4140,3000 h55 r90
  text "LATCH" at 6205,2995 h60 r90
  text "12V INT" at 2800,2985 h60
  text "ACB" at 1045,2935 h60 r90
  text "12V" at 1970,2630 h60
  text "MC_PW" at 6200,2615 h60 r90
  text "TSAL" at 4155,2505 h60 r90
  text "AMS_PW" at 1045,2440 h60 r90
  text "MC_EN" at 6205,2270 h60 r90
  text "IMD" at 1045,2125 h60 r90
  text "PUMP" at 4155,2125 h60 r90
  text "VCU" at 2000,2120 h60 r90
  text "BUZR" at 6205,1910 h60 r90
  text "RAD" at 4155,1770 h60 r90
  text "BRAKE" at 2000,1685 h60 r90
Bottom Overlay:
  drawing of 24 lines, arcs and shapes, not listed

## Text inside footprints (layer, text, board x,y; h text height)
DT13-2P: Top Overlay "1" at 6535,1580 h60
DT13-4P: Top Overlay "4" at 5065,1585 h60; Top Overlay "1" at 5085,1690 h60
DTP13-4P: Top Overlay "1" at 3000,1615 h60; Top Overlay "4" at 2980,1515 h60
FPC: Top Overlay "1" at 6245.4,3535 h60 r270
WM9796-ND: Top Overlay "1" at 1290,3380 h60 r180